# Allegro board ESP331.brd
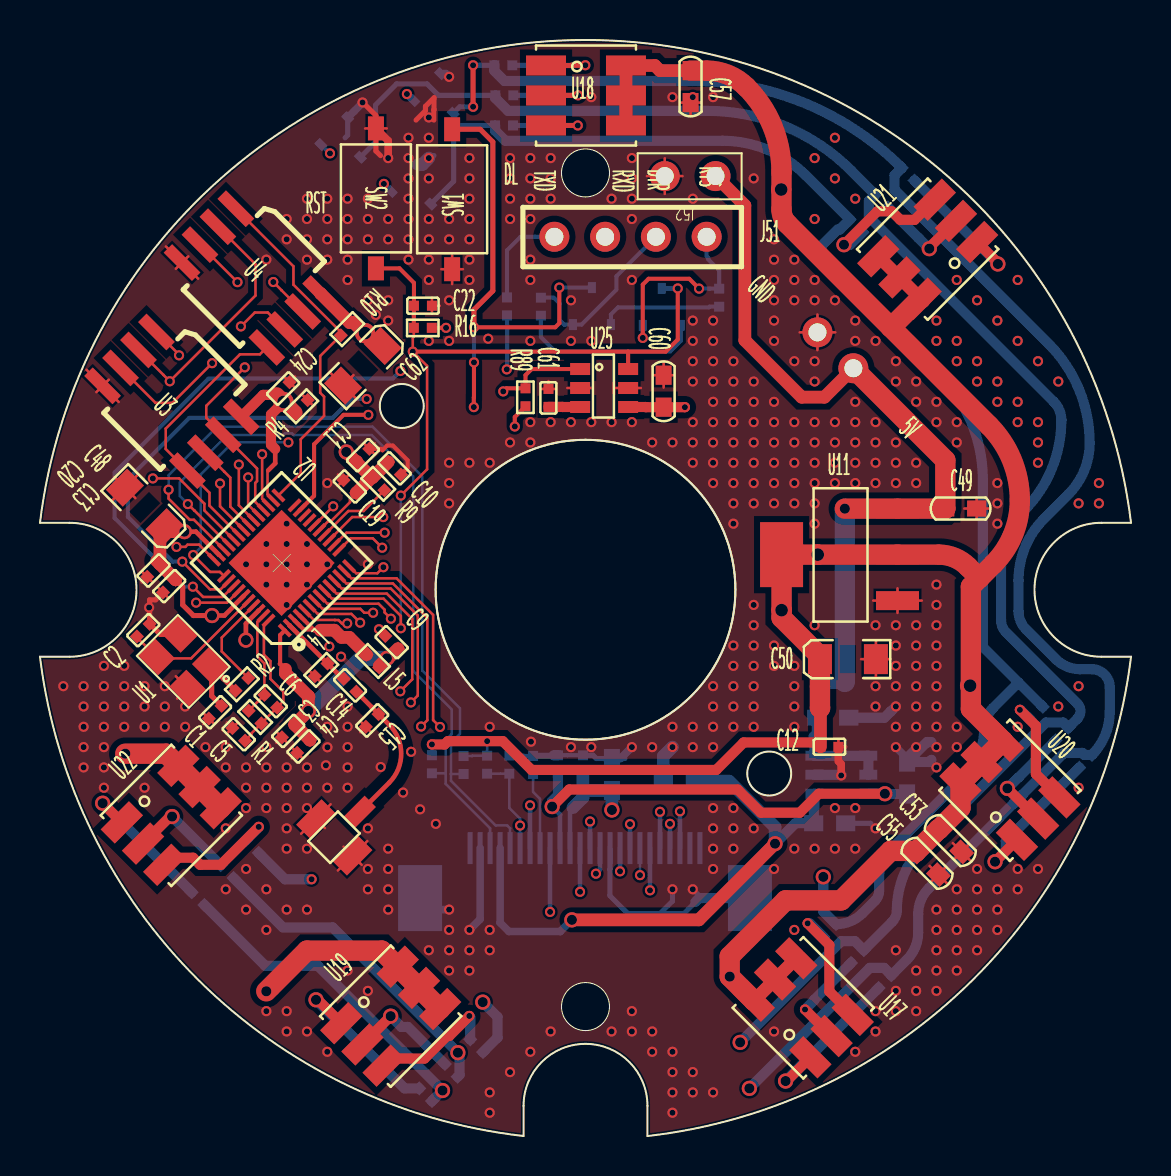
[diagram p0: board, top side]
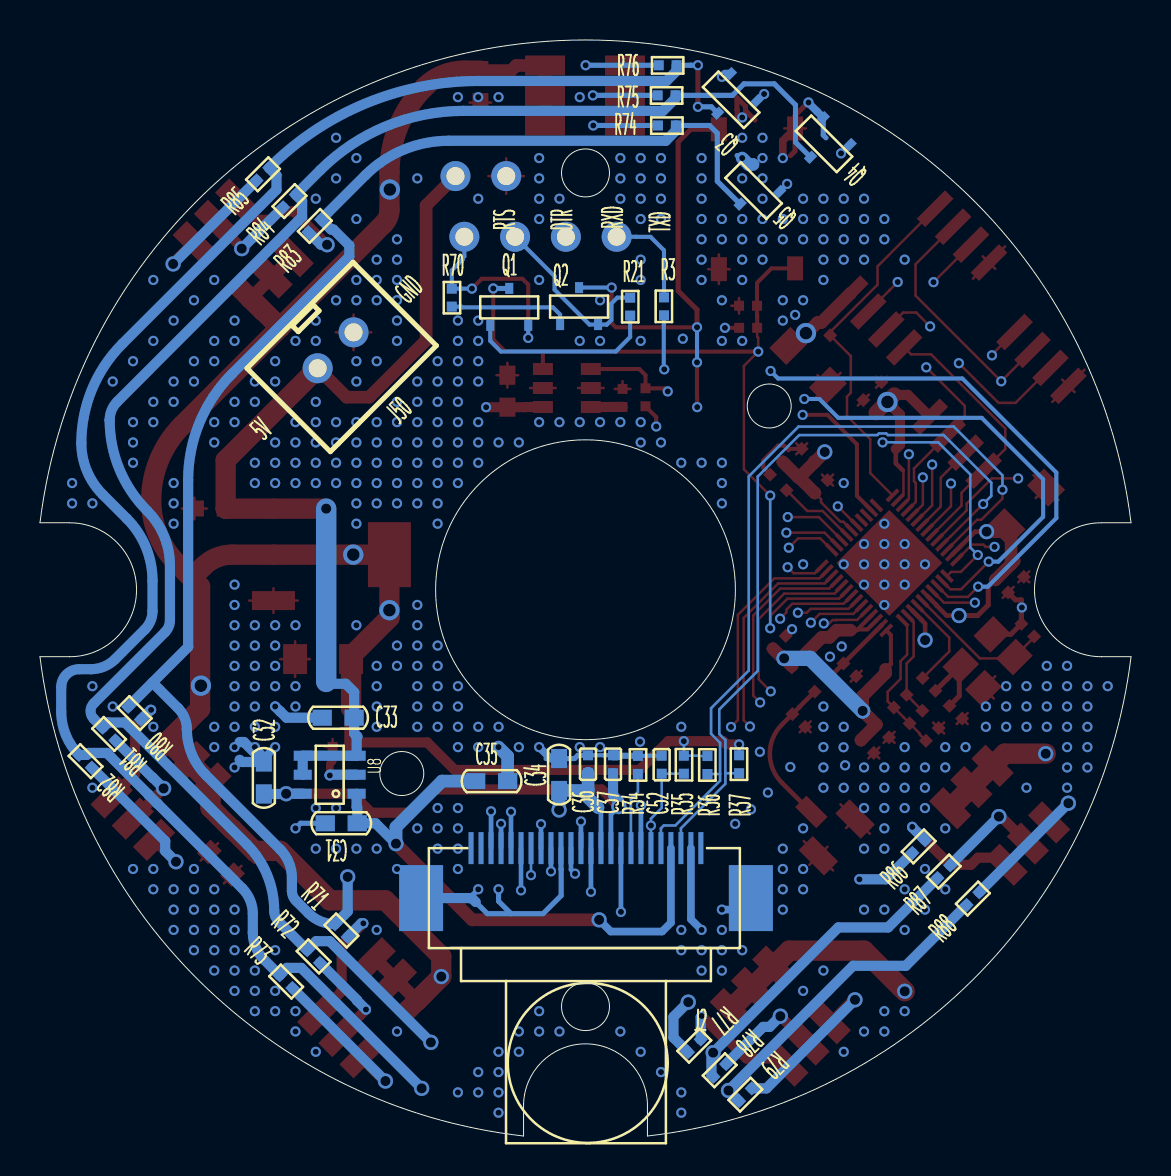
[diagram p1: board, bottom side, seen from below]

Outline 54.59 x 54.82 mm; copper layers: TOP, GND, SIG, BOTTOM. Coordinates in mm from the lower left corner of the outline.
Outline path: circle c18.1,36.52 r1.1 ; circle c27.3,48.17 r1.2 ; circle c27.3,27.32 r7.5 ; circle c27.3,6.47 r1.2 ; circle c36.49,18.13 r1.1 ; 0,30.67 arc(27.3,54.82) 54.59,30.67 53.11,30.67 arc(49.76,27.32) 53.11,23.97 54.59,23.97 arc(46.65,7.79) 30.4,0 30.4,1.51 arc(27.3,4.61) 24.2,1.51 24.2,0 arc(7.94,7.79) 0,23.97 1.48,23.97 arc(4.83,27.32) 1.48,30.67 0,30.67

## Design rules (mm)
net group DTR: nets DTR N16908429
net group RTS: nets N16908427 RTS
net group LED_B: nets LED_B N16960286 N16960785 N16961158 N16961522 N16961899 N16962291
net group LED_G: nets LED_G N16960306 N16960795 N16961160 N16961524 N16961901 N16962293
net group LED_R: nets LED_R N16960332 N16960797 N16961162 N16961526 N16961903 N16962295
net group RF: nets N16860839 N16860948 N16861170 N16861179 N16861214 N16861260 N16861530 N16861598 N16884685

## Placement (name value [footprint] x y rotation side)
C1  GRM1555C1H150JA01D  [C0402]  9.08 21.52 225 top
C2  GRM1555C1H150JA01D  [C0402]  4.85 24.99 45 top
C3  100pF/6.3V(10%)  [C0402]  12.74 20.58 225 top
C4  0.1uF/6.3V(10%)  [C0402]  13.51 19.8 225 top
C5  10nF/6.3V(10%)  [C0402]  10.26 19.77 135 top
C6  3.3nF/6.3V(10%)  [C0402]  11.23 22.07 315 top
C9  0.1uF/6.3V(10%)  [C0402]  17.92 24.38 135 top
C10  0.1uF/6.3V(10%)  [C0402]  17.42 33.72 315 top
C11  1uF/10V(20%)  [C0402]  15.84 33.74 45 top
C12  10uF/6.3V(20%)  [C0402]  39.05 19.47 0 top
C13  10uF/6.3V(20%)  [C0402]  6.79 27.83 225 top
C14  LQP15MN3N6B02D  [C0402]  15.2 22.87 314.3 top
C15  GRM1555C1H2R0BA01D  [C0402]  16.3 20.47 45 top
C19  0.1uF/6.3V(10%)  [C0402]  15.82 32.17 135 top
C20  1uF/10V(20%)  [C0402]  6 28.61 225 top
C22  1uF/10V(20%)  [C0402]  18.71 41.53 0 top
C24  1uF/10V(20%)  [C0402]  11.85 37.07 45 top
C31  10uF/10V(20%)  [C0603]  40.32 15.65 180 bottom
C32  10uF/10V(20%)  [C0603]  43.39 18.71 270 bottom
C33  10uF/10V(20%)  [C0603]  40.47 20.92 180 bottom
C34  4.7uF/10V(20%)  [C0603]  28.62 17.28 90 bottom
C35  4.7uF/10V(20%)  [C0603]  32.79 17.75 180 bottom
C36  0.1uF/16V(10%)  [C0402]  27.17 18.15 90 bottom
C37  1uF/10V(20%)  [C0402]  25.92 18.15 90 bottom
C48  47uF/6.3V(20%)  [C1206]  6.23 30.45 315 top
C49  10uF/16V  [C0603]  45.27 31.39 0 top
C50  22uF/16V  [C1206]  39.03 23.86 180 top
C52  1uF/10V(20%)  [C0402]  23.48 18.12 90 bottom
C53  0.1uF/16V  [C0603]  44.98 15.34 315 top
C55  0.1uF/16V  [C0603]  43.82 14.21 315 top
C57  0.1uF/16V  [C0603]  32.55 53.29 270 top
C60  0.1uF/16V  [C0603]  31.2 36.46 90 top
C61  220nF/6.3V  [C0402]  25.44 36.47 90 top
C62  47uF/10V(20%)  [C1206]  17.15 39.52 45 top
J2  FFC_24P_0P5  [OV9650FSL_PCB]  21.52 14.4 180 bottom
J39  IPEX  [ECT8180001581]  16 16.21 135 top
J50  CON2  [XH_2_54_2P]  40.7 38.4 135 bottom
J51  CON4  [CON_2_54_4P]  25.74 44.98 0 top
J52  CON2  [CON_2_54_2P]  33.8 48.02 180 top
L4  GRM1555C1H2R0BA01D  [R0402]  14.39 23.64 225 top
L5  2.0nH  [R0402]  16.34 24.08 315 top
Q1  S8050(NPN)  [SOT23-3]  31.11 42.4 180 bottom
Q2  S8050(NPN)  [SOT23-3]  27.62 42.44 180 bottom
Q3  S8050(NPN)  [SOT23-3]  20.68 51.16 45 bottom
Q4  S8050(NPN)  [SOT23-3]  16.03 48.96 45 bottom
Q5  S8050(NPN)  [SOT23-3]  19.55 46.61 45 bottom
R1  20K(5%)  [R0402]  10.44 21.27 315 top
R2  51R(5%)  [R0402]  9.79 22.27 45 top
R3  499R(1%)  [R0402]  23.37 41.05 90 bottom
R4  2K/NC  [R0402]  12.76 36.18 45 top
R9  10K(1%)(NC)  [R0402]  16.6 32.94 315 top
R10  10K(1%)  [R0402]  15.69 40.69 225 top
R16  10K(1%)  [R0402]  19.61 40.43 180 top
R21  12K(1%)  [R0402]  25.06 41.94 270 bottom
R34  10K(1%)  [R0402]  24.67 19.01 270 bottom
R35  10K(1%)  [R0402]  22.37 19.02 270 bottom
R36  3.3K(5%)  [R0402]  21.19 18.11 90 bottom
R37  3.3K(5%)  [R0402]  19.61 18.15 90 bottom
R70  12K(1%)  [R0402]  33.98 42.39 270 bottom
R71  100  [R0402]  39.83 10.6 225 bottom
R72  100  [R0402]  41.22 9.3 225 bottom
R73  100  [R0402]  42.6 8.04 225 bottom
R74  100  [R0402]  22.77 50.55 0 bottom
R75  100  [R0402]  22.79 52.05 0 bottom
R76  100  [R0402]  22.73 53.56 0 bottom
R77  100  [R0402]  22.17 4.2 135 bottom
R78  100  [R0402]  20.9 2.96 135 bottom
R79  100  [R0402]  19.61 1.75 135 bottom
R80  100  [R0402]  50.17 21.47 225 bottom
R81  100  [R0402]  51.46 20.43 225 bottom
R82  100  [R0402]  52.63 19.06 225 bottom
R83  100  [R0402]  40.52 45.85 315 bottom
R84  100  [R0402]  41.79 47.09 315 bottom
R85  100  [R0402]  43.12 48.43 315 bottom
R86  100  [R0402]  10.94 14.16 135 bottom
R87  100  [R0402]  9.68 12.91 135 bottom
R88  100  [R0402]  8.23 11.55 135 bottom
R89  10K(1%)  [R0402]  24.29 36.5 90 top
SW1  SW PUSHBUTTON  [KEY_3X6]  20.62 43.36 90 top
SW2  SW PUSHBUTTON  [KEY_3X6]  16.81 50.4 270 top
U1  40MHz+/-10ppm  [CRY_3225]  7.39 22.41 135 top
U2  ESP32-D0WD  [SLP48_5X5]  12.09 28.67 135 top
U3  EN25QH128A  [RZ7889]  4.45 34.49 315 top
U4  PSRAM64H  [RZ7889]  8.43 40.65 315 top
U8  RT9011-BM-PJ6  [SOT-23-6]  40.1 18.07 90 bottom
U11  TLV1117-33IDCY  [SOT223]  42.91 26.78 90 top
U17  RGB  [RGB_6]  38.19 6.41 315 top
U18  RGB  [RGB_6]  27.32 52.05 180 top
U19  RGB  [RGB_6]  17.55 6 225 top
U20  RGB  [RGB_6]  48.53 17.29 315 top
U21  RGB  [RGB_6]  44.42 44.36 45 top
U22  RGB  [RGB_6]  6.57 16.04 225 top
U25  TPS3813K33DBVT  [SOT23-6]  27.03 38.37 0 top

## Library data of the parts
C1-C6 C9-C15 C19 C20 C22 C24 C31-C37 C48-C50 C52 C53 C55 C57 C60-C62 = CAP NP
J2 = CON24_4
J39 = IPEX_0
J50 J52 = CON2
J51 = CON4
L4 L5 = CHOKE
Q1-Q5 = NPN BCE_2
R1-R4 R9 R10 = RESISTOR
R16 R89 = RESISTOR_0: signal model: DEFAULT_RESISTOR_10000OHM_1_2
R21 R34-R37 R70-R88 = RESISTOR_0: signal model: DEFAULT_RESISTOR_200OHM_1_2
SW1 = SW PUSHBUTTON_0
SW2 = SW PUSHBUTTON
U1 = X1_1
U2 = ESP8080_24
U3 = FLASH_3
U4 = PN18S32
U8 = NCP1117_3
U11 = TLV1117-33IDCY
U17-U22 = LED_RGB
U25 = TPS3813K33DBVT

## Footprints (pads in the part's own frame, mm; a bottom-side part is the same pattern mirrored in y, then rotated)
C0402
  rect 0.5x0.5 smd: 1(0,0) 2(0.9,0)
C0603
  rect 0.96x0.8 smd: 1(0,0) 2(1.6,0)
C1206
  rect 1.2x1.5 smd: 1(0,0) 2(-2.8,0)
CON_2_54_2P
  round 1.5 hole 0.9: 1(0,0) 2(2.54,0)
CON_2_54_4P
  round 1.5 hole 0.9: 1(0,0) 2(2.54,0) 3(5.08,0) 4(7.62,0)
CRY_3225
  rect 1.4x1.2 smd: 1(0,-1.6) 2(2.2,-1.6) 3(2.2,0) 4(0,0)
ECT8180001581
  rect 0.8x1.5 smd: 1(0,0)
  rect 1x1.8 smd: 2(-1.3,1.8) 3(1.3,1.8)
KEY_3X6
  rect 1.2x0.8 smd: 1(0,0) 2(7,0)
OV9650FSL_PCB
  rect 0.25x1.6 smd: 1(0,0) 2(-0.5,0) 3(-1,0) 4(-1.5,0) 5(-2,0) 6(-2.5,0) 7(-3,0) 8(-3.5,0) 9(-4,0) 10(-4.5,0) 11(-5,0) 12(-5.5,0) 13(-6,0) 14(-6.5,0) 15(-7,0) 16(-7.5,0) 17(-8,0) 18(-8.5,0) 19(-9,0) 20(-9.5,0) 21(-10,0) 22(-10.5,0) 23(-11,0) 24(-11.5,0)
  rect 2.2x3.3 smd: 25(-14,-2.5) 26(2.5,-2.5)
R0402
  rect 0.5x0.5 smd: 1(0,0) 2(0.9,0)
RGB_6
  rect 2x1 smd: 1(2,-1.5) 2(2,0) 3(2,1.5) 4(-2,1.5) 5(-2,0) 6(-2,-1.5)
RZ7889
  rect 2x0.6 smd: 1(-3.082,5.025) 2(-3.082,3.755) 3(-3.082,2.485) 4(-3.082,1.215) 5(2.918,1.215) 6(2.918,2.485) 7(2.918,3.755) 8(2.918,5.025)
SLP48_5X5
  rect 0.8x0.2 smd: 1(-2.5,2.275) 2(-2.5,1.925) 3(-2.5,1.575) 4(-2.5,1.225) 5(-2.5,0.875) 6(-2.5,0.525) 7(-2.5,0.175) 8(-2.5,-0.175) 9(-2.5,-0.525) 10(-2.5,-0.875) 11(-2.5,-1.225) 12(-2.5,-1.575) 13(-2.5,-1.925) 14(-2.5,-2.275) 25(2.5,-2.275) 26(2.5,-1.925) 27(2.5,-1.575) 28(2.5,-1.225) 29(2.5,-0.875) 30(2.5,-0.525) 31(2.5,-0.175) 32(2.5,0.175) 33(2.5,0.525) 34(2.5,0.875) 35(2.5,1.225) 36(2.5,1.575) 37(2.5,1.925) 38(2.5,2.275)
  rect 0.2x0.8 smd: 15(-1.575,-2.5) 16(-1.225,-2.5) 17(-0.875,-2.5) 18(-0.525,-2.5) 19(-0.175,-2.5) 20(0.175,-2.5) 21(0.525,-2.5) 22(0.875,-2.5) 23(1.225,-2.5) 24(1.575,-2.5) 39(1.575,2.5) 40(1.225,2.5) 41(0.875,2.5) 42(0.525,2.5) 43(0.175,2.5) 44(-0.175,2.5) 45(-0.525,2.5) 46(-0.875,2.5) 47(-1.225,2.5) 48(-1.575,2.5)
  rect 3.75x3.75 smd: 49(0,0)
SOT23-3
  rect 0.4x0.55 smd: 1(-0.95,-1.85) 2(0.95,-1.85) 3(0,0)
SOT23-6
  rect 1x0.6 smd: 1(0,0) 2(0,-0.95) 3(0,-1.9) 4(2.4,-1.9) 5(2.4,-0.95) 6(2.4,0)
SOT223
  rect 0.95x2.15 smd: 1(0,0) 2(2.3,0) 3(4.6,0)
  rect 3.25x2.15 smd: 4(2.3,5.8)
SOT-23-6
  rect 0.5x0.9 smd: 1(-0.95,-1.35) 2(0,-1.35) 3(0.95,-1.35) 4(0.95,1.35) 5(0,1.35) 6(-0.95,1.35)
XH_2_54_2P
  round 1.5 hole 0.9: 1(0,0) 2(2.54,0)

## Nets
AGND: C1.2 C2.2 C3.2 C4.2 C5.2 C9.2 C10.2 C11.2 C12.2 C13.2 C15.1 C19.2 C20.2 C22.2 C24.2 C31.1 C32.1 C33.1 C34.2 C35.2 C36.2 C37.2 C48.2 C49.2 C50.2 C52.2 C53.2 C55.2 C57.2 C60.2 C61.2 C62.2 J2.2(AGND) J2.15(DGND) J2.25(GND#25) J2.26(GND#26) J39.2(GND1) J39.3(GND2) J50.2 J52.2 L4.2 Q3.2(E) Q4.2(E) Q5.2(E) R4.2 R34.1 SW1.1 SW2.1 U1.2(GND#2) U1.4(GND#4) U2.49(GND) U3.4(GND) U4.4(VSS) U8.2(GND) U11.1(ADJ/GND) U25.2(GND) U25.5(WDR)
AVDD_2V8: C31.2 C35.1 J2.4(AVDD) U8.1(VOUT2)
DVDD_1V3: C32.2 C37.1 J2.10(DVDD) U8.6(VOUT1)
VBUS: C33.2 C49.1 J50.1 J52.1 U8.3(EN2) U8.4(EN1) U8.5(VIN) U11.3(INPUT)
VDD_SDIO: C24.1 C62.1 R4.1 R10.1 U2.26(VDD_SDIO) U3.8(VCC) U4.8(VDD)
B: Q5.1(B) U2.34(GPIO5)
CAM_RESET: C52.1 J2.6(RESET) R35.2 U2.13(32K_XN)
DOVDD_3V3: C3.1 C4.1 C9.1 C10.1 C11.1 C12.1 C13.1 C19.1 C20.1 C34.1 C36.1 C48.1 C50.1 C53.1 C55.1 C57.1 C60.1 J2.11(DOVDD) L5.2 R9.1 R16.1 R35.1 R36.2 R37.2 R89.1 U2.1(VDDA#1) U2.19(VDD3P3_RTC) U2.37(VDD3P3_CPU) U2.43(VDDA#43) U2.46(VDDA#46) U11.2(OUTPUT#2) U11.4(OUTPUT#4) U17.4(BA) U17.5(GA) U17.6(RA) U18.4(BA) U18.5(GA) U18.6(RA) U19.4(BA) U19.5(GA) U19.6(RA) U20.4(BA) U20.5(GA) U20.6(RA) U21.4(BA) U21.5(GA) U21.6(RA) U22.4(BA) U22.5(GA) U22.6(RA) U25.4(VCC)
DTR: J51.3 Q2.2(E) R21.1
DVP_HREF: J2.9(HREF) U2.5(SENSOR_VP)
DVP_PCLK: J2.17(PCLK) U2.12(32K_XP)
DVP_VSYNC: J2.7(VSYNC) U2.15(GPIO26)
DVP_Y2: J2.19(Y2) U2.6(SENSOR_CAPP)
DVP_Y3: J2.21(Y3) U2.17(MTMS)
DVP_Y4: J2.22(Y4) U2.20(MTCK)
DVP_Y5: J2.20(Y5) U2.16(GPIO27)
DVP_Y6: J2.18(Y6) U2.8(SENSOR_VN)
DVP_Y7: J2.16(Y7) U2.11(VDET_2)
DVP_Y8: J2.14(Y8) U2.10(VDET_1)
DVP_Y9: J2.12(Y9) U2.7(SENSOR_CAPN)
EN: C22.1 Q1.3(C) R16.2 SW2.2 U2.9(CHIP_PU) U25.6(R\E\S\E\T\)
FLASH_CLK: U2.31(SD_CLK) U3.6(CLK)
G: Q4.1(B) U2.38(GPIO19)
I2C_SCL: J2.5(SCL) R36.1 U2.36(GPIO23)
I2C_SDA: J2.3(SDA) R37.1 U2.35(GPIO18)
IO0: Q2.3(C) SW1.2 U2.23(GPIO0)
IO4: U2.24(GPIO4)
IO12: R9.2 U2.18(MTDI)
IO16: R10.2 U2.25(GPIO16) U4.1(CS#)
IO17: U2.27(GPIO17) U4.6(SCLK)
IO21: Q3.1(B) U2.42(GPIO21)
IO25: J2.13(XCLK) U2.14(GPIO25)
LED_B: Q5.3(C) R71.1 R74.1 R77.1 R80.1 R83.1 R86.1
LED_G: Q4.3(C) R72.1 R75.1 R78.1 R81.1 R84.1 R87.1
LED_R: Q3.3(C) R73.1 R76.1 R79.1 R82.1 R85.1 R88.1
PWDN: J2.8(PWDN) R34.2
RTS: J51.4 Q1.2(E) R70.1
RXD0: J51.2 U2.40(U0RXD)
SCS/CMD: U2.30(SD_CMD) U3.1(/CS)
SDI/SD1: U2.33(SD_DATA_1) U3.5(DI) U4.5(SI/SIO0)
SDO/SD0: U2.32(SD_DATA_0) U3.2(DO) U4.2(SO/SIO1)
SHD/SD2: U2.28(SD_DATA_2) U3.7(/HOLD) U4.7(SIO3)
SWP/SD3: U2.29(SD_DATA_3) U3.3(/WP) U4.3(SIO2)
TXD0: J51.1 R3.2
WDI: R89.2 U2.39(GPIO22) U25.1(WDI)
N16860839: C5.1 C6.2 R1.2 U2.48(CAP1)
N16860948: L5.1 U2.3(VDD3P3#3) U2.4(VDD3P3#4)
N16861170: C14.2 C15.2 J39.1(RF)
N16861179: C2.1 U1.3(XOUT) U2.44(XTAL_N)
N16861214: C1.1 R2.1 U1.1(XIN)
N16861260: C6.1 R1.1 U2.47(CAP2)
N16861530: R3.1 U2.41(U0TXD)
N16861598: R2.2 U2.45(XTAL_P)
N16884685: C14.1 L4.1 U2.2(LNA_IN)
N16908427: Q2.1(B) R70.2
N16908429: Q1.1(B) R21.2
N16960286: R71.2 U17.3(BK)
N16960306: R72.2 U17.2(GK)
N16960332: R73.2 U17.1(RK)
N16960785: R74.2 U18.3(BK)
N16960795: R75.2 U18.2(GK)
N16960797: R76.2 U18.1(RK)
N16961158: R77.2 U19.3(BK)
N16961160: R78.2 U19.2(GK)
N16961162: R79.2 U19.1(RK)
N16961522: R80.2 U20.3(BK)
N16961524: R81.2 U20.2(GK)
N16961526: R82.2 U20.1(RK)
N16961899: R83.2 U21.3(BK)
N16961901: R84.2 U21.2(GK)
N16961903: R85.2 U21.1(RK)
N16962291: R86.2 U22.3(BK)
N16962293: R87.2 U22.2(GK)
N16962295: R88.2 U22.1(RK)
N16988764: C61.1 U25.3(WDT)

Pads without a net: J2 1 23 24; U2 21 22

## Via types
v1: diameter 0.508, hole 0.305, TOP to BOTTOM, 548 vias
v2: diameter 0.762, hole 0.508, TOP to BOTTOM, 31 vias
v3: diameter 1.016, hole 0.635, TOP to BOTTOM, 6 vias

## Routing (per net, layer and track width the routed paths; a pad name or vN(x,y) marks a point on that pad's centre or on a via; arc(x,y) is an arc through that point)
AGND: length 136.9
  TOP w0.127: 6.87,21.88 U1.4 6.8,23 ; 41.69,26.78 U11.1 ; U11.1 44.12,26.78 ; U11.1 42.91,26.17 ; U11.1 42.91,27.4 ; 13.48,23.28 L4.2 14.03,22.72 ; 15.19,14.47 J39.2 ; J39.2 16.09,13.57 ; J39.2 14.91,13.28 ; J39.2 16.38,14.75 ; C50.2 42.57,23.86 ; C50.2 41.09,23.86 ; C50.2 41.83,24.75 ; C50.2 41.83,22.97 ; 16.03,20.74 C15.1 ; C15.1 16.58,20.19 ; C15.1 16.03,20.19 ; 6.3,44.5 U4.4 ; U4.4 6.8,43.38 ; U4.4 7.42,44 ; U4.4 7.91,42.88 ; C1.2 8.72,20.61 ; C1.2 8.17,20.61 ; C1.2 8.17,21.16 ; C55.2 45.39,12.64 ; C55.2 45.33,13.46 ; C55.2 44.57,12.69 ; C55.2 44.51,13.51 ; 11.83,19.67 C3.2 ; C3.2 11.83,20.22 ; C3.2 12.38,19.67 ; 30.07,37.42 U25.5 28.79,37.42 ; 2.33,38.33 U3.4 ; U3.4 3.94,36.72 ; U3.4 3.44,37.84 ; U3.4 2.82,37.21 ; 32.01,51.69 C57.2 ; C57.2 33.09,51.69 ; C57.2 32.55,51.07 ; C49.2 47.49,31.39 ; C49.2 46.87,30.85 ; C49.2 46.87,31.93 ; C49.2 46.25,31.39 ; C22.2 20,41.53 ; C22.2 19.61,41.92 ; C22.2 19.61,41.14 ; 9.35,20.68 C5.2 ; C5.2 9.35,20.13 ; C5.2 9.9,20.68 ; 14.91,33.08 C19.2 ; C19.2 14.91,32.53 ; C19.2 15.46,33.08 ; C61.2 25.83,37.37 ; C61.2 25.05,37.37 ; C61.2 25.44,37.76 ; J52.2 32.15,48.02 ; J52.2 31.26,47.13 ; J52.2 31.26,48.91 ; J52.2 30.37,48.02 ; C60.2 31.2,38.68 ; C60.2 31.74,38.06 ; C60.2 31.2,37.44 ; C60.2 30.66,38.06 ; J39.3 14.26,15.4 ; J39.3 14.54,16.59 ; J39.3 13.35,16.31 ; J39.3 13.07,15.12 ; 45.73,13.83 C53.2 ; C53.2 46.5,14.59 ; C53.2 45.68,14.65 ; C53.2 46.55,13.77 ; 27.67,37.42 U25.2 26.39,37.42 ; 39.95,19.86 C12.2 40.34,19.47 ; 17.35,50.4 SW2.1 16.27,50.4 ; 13.67,36.54 R4.2 13.12,37.09 ; 38.9,39.31 J50.2 ; J50.2 39.79,40.2 ; J50.2 38.9,41.09 ; J50.2 38.01,40.2 ; 20.62,42.62 SW1.1 ; SW1.1 21.16,43.36 ; SW1.1 20.62,44.1 ; SW1.1 20.08,43.36 ; C24.2 12.76,37.43 ; C24.2 12.76,37.98 ; C24.2 12.21,37.98 ; 12.59,19.44 C4.2 ; C4.2 13.15,18.89 ; C4.2 12.59,18.89 ; 6.43,26.91 5.88,27.47 ; C11.2 16.75,34.1 ; C11.2 16.75,34.65 ; C11.2 16.2,34.65 ; C48.2 4.77,31.91 ; C48.2 3.62,31.8 ; C48.2 4.88,33.06 ; C48.2 3.73,32.96 ; 16.81,51.05 16.81,51.14 ; C62.2 15.69,38.06 ; C62.2 15.79,36.91 ; C62.2 14.54,38.17 ; C20.2 5.64,27.69 ; C20.2 5.09,27.69 ; C20.2 5.09,28.25 ; C2.2 5.46,25.65 v1(5.46,26.44)
  TOP w0.203: C11.2 17.06,34.38 17.14,34.3 17.37,34.54 17.66,34.54 18.4,33.8 18.4,33.42 C10.2 18.12,33.08
  TOP w0.254: U1.2 6.02,25.09 C2.2 5.49,26.31 5.49,26.82 5.78,26.82 6.15,27.19 ; 17.04,49.04 16.81,49.27 SW2.1 16.81,51.05 16.15,51.71 ; 19.71,50.82 19.71,51.33 19.72,51.34 19.72,51.94 19.29,51.51 19.29,51.29 18.82,50.82
  TOP w0.381: SW2.1 17.42,49.79 v1(17.42,48.92) ; C9.2 17.28,25.03 v1(16.96,25.35) ; C12.2 39.95,18.75 40.09,18.61 v1(40.09,18.03)
  GND w0.127: 31.26,47.13 J52.2 ; J52.2 30.37,48.02 ; J52.2 32.15,48.02 ; J52.2 31.26,48.91 ; J50.2 39.79,40.2 ; J50.2 38.9,41.09 ; J50.2 38.01,40.2 ; J50.2 38.9,39.31
  BOTTOM w0.203: C52.2 24.18,19.02 24.19,19.01 R34.1 24.72,18.97 25.84,18.97 C37.2 26.4,19.05 27.17,19.05
  BOTTOM w0.254: 33.1,11.9 v1(32.66,12.34) ; 15.26,49.93 15.4,50.07 Q4.2 ; 19.71,49.04 19.26,48.59 19.13,48.59 ; 31.02,11.12 32.21,11.12 32.79,11.71 ; 31.02,11.12 29.42,11.12 28.51,12.03 28.51,13.34 28.52,13.35 J2.15 ; 31.02,11.12 31.65,11.75 v1(31.65,12.34) ; 29.27,18.88 29.04,18.88 ; v1(36.73,13.36) 35.52,12.15 J2.25 ; C34.2 27.84,18.88 27.67,19.05 27.17,19.05 ; v1(41.81,15.39) 41.55,15.65 C31.1 ; R34.1 24.71,19.05 25.7,19.05 ; 15.72,51.26 15.72,51.28 16.15,51.71
  BOTTOM w0.381: Q4.2 16.14,51.68 v1(16.14,51.7) ; v1(29.62,19.45) 29.04,18.88 C34.2 ; v1(20.47,52.98) 20.31,53.14 Q3.2 ; 40.05,18.07 v1(40.09,18.03) ; v1(21.49,10.31) 22.02,10.84 J2.2 ; v1(20.47,11.33) 19.6,11.33 J2.26 ; C32.1 43.39,18.89 ; 43.39,18.89 43.39,19 v1(43.84,19.45) ; 43.39,18.89 v1(42.82,19.45)
  BOTTOM w0.508: 40.11,18.05 40.09,18.07 U8.2 ; 44.6,19.71 44.39,19.71 C32.1 44.49,18.71 44.6,18.82 ; C33.1 42.25,20.92 42.56,21.23 42.57,21.23 v1(42.82,21.49) ; 25.7,19.05 C37.2 ; J2.25 32.99,11.9 32.79,11.71
  BOTTOM w0.635: Q5.2 19.13,48.59 v1(19.46,48.92) ; v1(31.65,19.45) 31.19,19 C35.2
  vias: v1(1.17,22.5) v1(2.18,22.5) v1(2.18,21.49) v1(2.18,20.47) v1(2.18,19.45) v1(2.18,18.44) v1(3.2,23.52) v1(3.2,22.5) v1(3.2,21.49) v1(3.2,20.47) v1(3.2,19.45) v1(3.2,18.44) v1(3.2,17.42) v1(4.22,23.52) v1(4.22,22.5) v1(4.22,21.49) v1(4.22,20.47) v1(5.23,22.5) v1(5.23,21.49) v1(5.23,20.47) v1(5.23,17.42) v1(6.25,22.5) v1(6.25,21.49) v1(6.25,20.47) v1(7.26,21.49) v1(7.26,20.47) v1(8.28,19.45) v1(9.3,19.45) v1(9.3,18.44) v1(9.3,15.39) v1(9.3,12.34) v1(10.31,28.6) v1(10.31,18.44) v1(10.31,17.42) v1(10.31,16.41) v1(10.31,13.36) v1(10.31,11.33) v1(11.33,43.84) v1(11.33,29.61) v1(11.33,28.6) v1(11.33,27.58) v1(11.33,19.45) v1(11.33,18.44) v1(11.33,17.42) v1(11.33,16.41) v1(11.33,12.34) v1(11.33,10.31) v1(11.33,6.25) v1(12.34,45.87) v1(12.34,44.85) v1(12.34,30.63) v1(12.34,29.61) v1(12.34,28.6) v1(12.34,27.58) v1(12.34,26.57) v1(12.34,18.44) v1(12.34,17.42) v1(12.34,16.41) v1(12.34,15.39) v1(12.34,14.37) v1(12.34,11.33) v1(12.34,6.25) v1(12.34,5.23) v1(13.36,46.89) v1(13.36,45.87) v1(13.36,44.85) v1(13.36,43.84) v1(13.36,29.61) v1(13.36,28.6) v1(13.36,27.58) v1(13.36,18.44) v1(13.36,17.42) v1(13.36,16.41) v1(13.36,14.37) v1(13.36,11.33) v1(13.36,5.23) v1(14.31,18.54) v1(14.38,46.89) v1(14.38,45.87) v1(14.38,44.85) v1(14.38,43.84) v1(14.38,32.66) v1(14.38,28.6) v1(14.38,20.47) v1(14.38,19.45) v1(14.38,17.42) v1(14.38,4.21) v1(14.48,24.49) v1(15.06,23.98) v1(15.39,46.89) v1(15.39,45.87) v1(15.39,44.85) v1(15.39,43.84) v1(15.39,42.82) v1(15.39,21.49) v1(15.39,20.47) v1(15.39,19.45) v1(15.39,18.44) v1(15.39,17.42) v1(15.39,8.28) v1(16.41,46.89) v1(16.41,45.87) v1(16.41,44.85) v1(16.41,41.81) v1(16.41,28.6) v1(16.41,15.39) v1(16.41,13.36) v1(16.41,12.34) v1(16.41,7.26) v1(16.81,41.07) v1(17.05,18.46) v1(17.42,45.87) v1(17.42,44.85) v1(17.42,41.81) v1(17.42,40.79) v1(17.42,14.37) v1(17.42,13.36) v1(17.42,12.34) v1(17.42,11.33) v1(18.17,17.18) v1(18.44,49.93) v1(18.44,48.92) v1(18.44,47.9) v1(18.44,46.89) v1(18.44,45.87) v1(18.44,44.85) v1(18.44,43.84) v1(18.57,19.22) v1(19.02,16.34) v1(19.46,50.95) v1(19.46,49.93) v1(19.46,47.9) v1(19.46,45.87) v1(19.46,44.85) v1(19.46,43.84) v1(19.46,42.82) v1(19.46,39.77) v1(19.46,9.29) v1(19.81,15.61) v1(20.47,45.87) v1(20.47,44.85) v1(20.47,41.81) v1(20.47,39.77) v1(20.47,33.68) v1(20.47,32.66) v1(20.47,31.65) v1(20.47,10.31) v1(20.47,9.29) v1(20.47,8.28) v1(21.49,48.92) v1(21.49,47.9) v1(21.49,46.89) v1(21.49,45.87) v1(21.49,44.85) v1(21.49,43.84) v1(21.49,42.82) v1(21.49,33.68) v1(21.49,9.29) v1(21.49,8.28) v1(22.43,39.88) v1(22.5,33.68) v1(22.5,20.47) v1(22.5,10.31) v1(22.5,9.29) v1(22.5,2.18) v1(22.5,1.17) v1(23.52,48.92) v1(23.52,47.9) v1(23.52,46.89) v1(23.52,45.87) v1(23.52,34.69) v1(23.52,3.2) v1(24.54,48.92) v1(24.54,47.9) v1(24.54,46.89) v1(24.54,45.87) v1(24.54,43.84) v1(24.54,42.82) v1(24.54,39.77) v1(24.54,35.71) v1(24.54,34.69) v1(24.54,4.21) v1(24.57,19.72) v1(25.55,48.92) v1(25.55,47.9) v1(25.55,46.89) v1(25.55,35.71) v1(25.55,5.23) v1(26.57,41.81) v1(26.57,39.77) v1(26.57,35.71) v1(26.57,19.45) v1(27.58,51.97) v1(27.58,39.77) v1(27.58,35.71) v1(27.58,19.45) v1(28.6,46.89) v1(28.6,35.71) v1(28.6,5.23) v1(29.62,48.92) v1(29.62,47.9) v1(29.62,46.89) v1(29.62,45.87) v1(29.62,42.82) v1(29.62,35.71) v1(29.62,6.25) v1(29.62,5.23) v1(30.63,34.69) v1(30.63,19.45) v1(30.63,5.23) v1(30.63,4.21) v1(31.65,51.97) v1(31.65,34.69) v1(31.65,20.47) v1(31.65,4.21) v1(31.65,3.2) v1(31.65,2.18) v1(31.65,1.17) v1(32.66,51.97) v1(32.66,46.89) v1(32.66,40.79) v1(32.66,39.77) v1(32.66,38.76) v1(32.66,37.74) v1(32.66,35.71) v1(32.66,34.69) v1(32.66,33.68) v1(32.66,20.47) v1(32.66,19.45) v1(32.66,3.2) v1(32.66,2.18) v1(33.68,51.97) v1(33.68,40.79) v1(33.68,39.77) v1(33.68,38.76) v1(33.68,37.74) v1(33.68,36.73) v1(33.68,35.71) v1(33.68,34.69) v1(33.68,33.68) v1(33.68,32.66) v1(33.68,22.5) v1(33.68,21.49) v1(33.68,20.47) v1(33.68,19.45) v1(33.68,16.41) v1(33.68,15.39) v1(33.68,14.37) v1(33.68,13.36) v1(33.68,2.18) v1(34.7,38.76) v1(34.7,37.74) v1(34.7,36.73) v1(34.7,35.71) v1(34.7,34.69) v1(34.7,33.68) v1(34.7,32.66) v1(34.7,31.65) v1(34.7,30.63) v1(34.7,24.53) v1(34.7,23.52) v1(34.7,22.5) v1(34.7,21.49) v1(34.7,20.47) v1(34.7,16.41) v1(34.7,15.39) v1(34.7,14.37) v1(35.71,47.9) v1(35.71,37.74) v1(35.71,36.73) v1(35.71,35.71) v1(35.71,34.69) v1(35.71,33.68) v1(35.71,32.66) v1(35.71,31.65) v1(35.71,26.57) v1(35.71,25.55) v1(35.71,24.53) v1(35.71,23.52) v1(35.71,22.5) v1(35.71,21.49) v1(35.71,20.47) v1(35.71,15.39) v1(36.73,44.85) v1(36.73,43.84) v1(36.73,42.82) v1(36.73,41.81) v1(36.73,40.79) v1(36.73,39.77) v1(36.73,36.73) v1(36.73,35.71) v1(36.73,34.69) v1(36.73,33.68) v1(36.73,32.66) v1(36.73,31.65) v1(36.73,24.53) v1(36.73,23.52) v1(36.73,5.23) v1(37.74,43.84) v1(37.74,42.82) v1(37.74,41.81) v1(37.74,38.76) v1(37.74,35.71) v1(37.74,34.69) v1(37.74,33.68) v1(37.74,32.66) v1(37.74,31.65) v1(37.74,23.52) v1(37.74,22.5) v1(37.74,21.49) v1(37.74,20.47) v1(37.74,14.37) v1(37.74,10.31) v1(38.76,48.92) v1(38.76,45.87) v1(38.76,42.82) v1(38.76,41.81) v1(38.76,38.76) v1(38.76,37.74) v1(38.76,35.71) v1(38.76,34.69) v1(38.76,33.68) v1(38.76,32.66) v1(38.76,31.65) v1(38.76,30.63) v1(38.76,25.55) v1(38.76,14.37) v1(39.78,49.93) v1(39.78,47.9) v1(39.78,41.81) v1(39.78,35.71) v1(39.78,34.69) v1(39.78,33.68) v1(39.78,32.66) v1(39.78,16.41) v1(39.78,14.37) v1(40.79,46.89) v1(40.79,40.79) v1(40.79,39.77) v1(40.79,36.73) v1(40.79,35.71) v1(40.79,34.69) v1(40.79,33.68) v1(40.79,32.66) v1(40.79,16.41) v1(40.79,14.37) v1(40.79,4.21) v1(41.81,39.77) v1(41.81,35.71) v1(41.81,34.69) v1(41.81,33.68) v1(41.81,32.66) v1(41.81,25.55) v1(41.81,22.5) v1(41.81,21.49) v1(41.81,6.25) v1(41.81,5.23) v1(42.82,38.76) v1(42.82,37.74) v1(42.82,34.69) v1(42.82,33.68) v1(42.82,32.66) v1(42.82,25.55) v1(42.82,24.53) v1(42.82,23.52) v1(42.82,22.5) v1(42.82,20.47) v1(42.82,9.29) v1(42.82,7.26) v1(42.82,6.25) v1(43.84,37.74) v1(43.84,36.73) v1(43.84,33.68) v1(43.84,32.66) v1(43.84,25.55) v1(43.84,24.53) v1(43.84,23.52) v1(43.84,22.5) v1(43.84,21.49) v1(43.84,20.47) v1(43.84,8.28) v1(43.84,7.26) v1(43.84,6.25) v1(44.86,40.79) v1(44.86,39.77) v1(44.86,36.73) v1(44.86,35.71) v1(44.86,27.58) v1(44.86,26.57) v1(44.86,25.55) v1(44.86,24.53) v1(44.86,23.52) v1(44.86,22.5) v1(44.86,21.49) v1(44.86,20.47) v1(44.86,19.45) v1(44.86,18.44) v1(44.86,11.33) v1(44.86,10.31) v1(44.86,9.29) v1(44.86,8.28) v1(44.86,7.26) v1(45.87,42.82) v1(45.87,39.77) v1(45.87,38.76) v1(45.87,35.71) v1(45.87,34.69) v1(45.87,20.47) v1(45.87,19.45) v1(45.87,12.34) v1(45.87,11.33) v1(45.87,10.31) v1(45.87,9.29) v1(45.87,8.28) v1(46.89,41.81) v1(46.89,38.76) v1(46.89,37.74) v1(46.89,13.36) v1(46.89,12.34) v1(46.89,11.33) v1(46.89,10.31) v1(46.89,9.29) v1(47.9,40.79) v1(47.9,37.74) v1(47.9,36.73) v1(47.9,32.66) v1(47.9,31.65) v1(47.9,30.63) v1(47.9,12.34) v1(47.9,11.33) v1(47.9,10.31) v1(48.92,42.82) v1(48.92,39.77) v1(48.92,36.73) v1(48.92,35.71) v1(48.92,20.47) v1(48.92,13.36) v1(48.92,12.34) v1(49.94,38.76) v1(49.94,35.71) v1(49.94,34.69) v1(49.94,33.68) v1(49.94,13.36) v1(50.95,37.74) v1(50.95,21.49) v1(51.97,31.65) v1(51.97,22.5) v1(51.97,17.42) v1(52.98,32.66) v1(52.98,31.65)
AVDD_2V8: length 29.1
  TOP w0.635: v2(36.78,14.62) 32.97,10.81 v2(26.61,10.81)
  BOTTOM w0.381: J2.4 23.02,10.67 23.46,10.23 26.03,10.23 v2(26.61,10.81)
  BOTTOM w0.508: v2(36.78,14.62) 37.8,15.65 C31.2 38.72,16.43 38.75,16.46 U8.1
  BOTTOM w0.635: v2(36.78,14.62) 36.78,15.45 34.48,17.75 C35.1
DVDD_1V3: length 23.9
  TOP w0.508: v2(25.63,16.48) 26.48,17.33 34.91,17.33 36.07,16.17 38.02,16.17 38.97,17.12 v2(42.27,17.12)
  BOTTOM w0.229: J2.10 26.02,16.08 25.71,16.39
  BOTTOM w0.508: C32.2 42.29,17.11 v2(42.27,17.12) U8.6 ; 25.71,16.39 v2(25.63,16.48) 25.63,16.75 25.92,17.04 C37.1
VBUS: length 47.2
  TOP w0.635: J52.1 35.27,46.55 35.27,39.8 38.11,36.96 39.25,36.96 J50.1
  TOP w1.016: J50.1 45.3,33.8 45.3,31.39 45.29,31.38 45.26,31.38 ; 45.26,31.38 C49.1 ; 45.26,31.38 U11.3 v2(40.27,31.38)
  BOTTOM w0.508: 40.27,22.71 40.18,22.62 39.29,22.62 38.87,22.2 C33.2 38.87,20.14 38.71,19.98 38.75,19.95 U8.3 U8.4 U8.5
  BOTTOM w1.016: v2(40.27,31.38) 40.27,22.71
VDD_SDIO: length 19.3
  TOP w0.127: U2.26 11.39,32.09 11.39,33.26 11.42,33.3
  TOP w0.229: 11.77,34.37 11.77,33.65 11.42,33.3
  TOP w0.508: v3(12.19,36.72) 11.56,36.09 11.56,34.58 11.77,34.37 ; C24.1 11.16,37.07 U3.8
  TOP w0.635: v3(12.19,36.72) 11.85,37.06 C24.1 ; C62.1 16.91,39.52 v3(16.27,40.16) 16.22,40.16 R10.1 15.5,40.69 U4.8 ; R4.1 12.74,36.18
  TOP w0.762: R4.1 12.21,36.72 v3(12.19,36.72) 12.19,36.73 C24.1
  SIG w0.635: v3(16.27,40.16) 14.83,38.72 14.19,38.72 v3(12.19,36.72)
B: length 29.1
  TOP w0.127: v1(5.65,32.89) 6.96,32.89 8.23,31.63 8.23,31.29 U2.34
  SIG w0.203: v1(5.65,32.89) 5.15,33.4 5.15,40.16 13.1,48.12 16.72,48.12 v1(17.21,47.63)
  BOTTOM w0.203: v1(17.21,47.63) 17.21,47.62 Q5.1
CAM_RESET: length 23.6
  TOP w0.127: U2.13 15.22,28.26 15.58,27.89 17.84,27.89 19.67,26.07 19.67,20.81 v1(20.02,20.46)
  SIG w0.127: v1(24.02,15.53) 22.54,15.53 20.13,17.95 20.13,19.91 20.02,20.02 v1(20.02,20.46)
  BOTTOM w0.127: R35.2 23.04,18.12 C52.1 23.48,16.41 24.02,15.87 v1(24.02,15.53) J2.6
DOVDD_3V3: length 237.9
  TOP w0.127: U2.19 14.4,30.73 14.53,30.73 15.51,31.71 15.51,31.86 C19.1
  TOP w0.203: U2.1 12.25,25.29 12.02,25.06 12.02,23.63 12.01,23.62 ; R16.1 v1(20.32,40.43) ; R89.1 23.76,35.96 v1(23.76,35.49)
  TOP w0.229: U2.43 9.74,26.57 9.74,26.55 9.23,26.03 v2(8.61,26.03) ; v2(7.22,30.23) 7.8,30.23 8.96,29.07 U2.37 ; U2.46 10.49,25.83 10.49,25.81 10.3,25.63 v2(10.3,24.81) ; 12.01,23.62 12.28,23.34
  TOP w0.254: v2(8.61,26.03) 7.67,26.03 7.14,26.57 7.14,27.47 C13.1 ; L5.2 16.98,23.51
  TOP w0.508: U22.6 U22.5 ; v1(19.61,19.59) 20.25,19.59 20.41,19.75 v1(22.37,19.75) 23.16,19.75 24.6,18.31 33.84,18.31 35.21,19.69 38.83,19.69 39.04,19.48 ; v1(32.27,36.46) C60.1 30.32,36.46 30.31,36.47 U25.4 ; U21.6 U21.5 U21.4 ; 17.36,23.95 v2(17.36,23.89)
  TOP w0.635: U17.6 U17.5 ; U17.6 v2(34.51,7.97) ; U17.6 U17.5 ; U17.5 U17.4 ; C20.1 6,30.22 C48.1 6.45,30.23 v2(7.22,30.23) ; C20.1 5.84,28.77 ; C20.1 6.78,27.83 C13.1 ; v2(15.32,34.22) 15.8,33.74 C11.1 15.84,33.69 R9.1 ; U21.4 U21.5 U21.6 ; C12.1 39.05,22.46 39.03,22.48 ; 6.32,19.12 U22.6 ; U18.5 U18.4 U18.5 ; U18.5 U18.6 30.76,53.55 31.02,53.29 C57.1 ; C4.1 13.51,19.81 C3.1 v2(13.43,21.26) 13.43,22 ; R9.1 15.83,32.17 C19.1 ; R9.1 16.64,32.94 C10.1 ; 13.43,22 12.28,23.15 12.28,23.34 ; 13.43,22 13.46,21.97 ; C9.1 17.43,23.89 v2(17.36,23.89) 16.98,23.51 ; U22.4 U22.5
  TOP w1.016: U20.5 U20.4 ; U20.5 47.12,18.71 ; U20.5 47.12,18.71 ; U20.4 47.12,18.71 ; U20.4 46.58,21.36 46.58,27.48 47,27.91 ; U22.4 U22.5 U22.6 6.32,19.12 v2(4.27,19.12) ; 42.58,40.44 44.03,41.89 U21.6 ; 42.58,40.44 37.4,45.63 arc(37.18,45.95) 37.1,46.34 37.1,48.22 arc(36.64,50.52) 35.34,52.47 arc(34.43,53.08) 33.36,53.29 C57.1 ; 42.58,40.44 47.47,35.55 arc(48.62,33.83) 49.03,31.8 arc(48.68,30.07) 47.71,28.61 47,27.91 ; 47.12,18.71 U20.6 ; 47.12,18.71 U20.6 ; U20.6 46.05,16.42 C53.1 44.96,15.34 C55.1 43.76,14.26 42.56,14.26 40.09,11.79 37.31,11.79 34.51,8.99 v2(34.51,7.97) U17.6 35.72,6.77 ; U19.4 U19.5 U19.6 17.1,9.27 13.36,9.27 v2(11.32,7.24) ; 39.04,21.41 39.03,21.42 C50.1 39.03,24.01 37.11,25.92 v3(37.11,26.3) U11.4 v3(38.92,29.08) U11.2 44.98,29.08 arc(45.76,28.93) 46.43,28.48 47,27.91
  SIG w0.635: 11.28,25.75 10.34,24.81 v2(10.3,24.81) ; 9.82,27.21 9.23,26.62 9.19,26.62 v2(8.61,26.03)
  SIG w0.762: 8.65,30.23 9.8,30.23 13.8,34.23 13.81,34.22 v2(15.32,34.22) ; 8.65,30.23 8.65,28.38 13.43,23.6 v2(13.43,21.26) ; 8.65,30.23 v2(7.22,30.23)
  SIG w1.016: v2(11.32,7.24) 5.31,13.25 5.31,14.2 4.27,15.25 v2(4.27,19.12)
  BOTTOM w0.127: R36.2 21.63,19.01 21.65,19.02 R35.1 v1(22.37,19.75) ; R37.2 v1(19.61,19.59)
  BOTTOM w0.229: 26.67,16.43 26.52,16.28 J2.11
  BOTTOM w0.635: 27.17,17.31 C36.1 ; 27.17,17.31 27.17,16.93 26.67,16.43 ; 27.17,17.31 27.19,17.28 C34.1 v2(28.62,16.31)
  BOTTOM w0.762: v2(17.36,23.89) 16.06,23.89 v2(13.43,21.26)
  vias: v3(37.08,47.35) v3(46.54,22.53)
DTR: length 9
  BOTTOM w0.203: R21.1 25.7,41.94 26,41.64 26,40.82 26.23,40.59 26.24,40.59 26.24,40.59 Q2.2 27.1,40.59 28.84,42.33 28.84,43 J51.3
DVP_HREF: length 26.1
  TOP w0.127: U2.5 13.24,26.28 13.7,25.82 14.75,25.82 14.76,25.81 14.94,25.81 15.1,25.64 v1(15.37,25.64)
  SIG w0.127: v1(15.37,25.64) 15.96,25.05 15.96,17.58 22.34,11.21 v1(25.52,11.21)
  BOTTOM w0.229: J2.9 v1(25.52,11.21)
DVP_PCLK: length 27.4
  TOP w0.127: v1(19.07,20.48) 19.38,20.8 19.38,25.91 17.66,27.64 15.33,27.64 14.97,28 U2.12
  SIG w0.127: v1(29.52,15.6) 29.52,14.52 29.23,14.23 23.36,14.23 19.07,18.52 v1(19.07,20.48)
  BOTTOM w0.229: J2.17 v1(29.52,15.6)
DVP_VSYNC: length 21.7
  TOP w0.127: v1(17.12,29.43) 16.66,29.9 15.55,29.9 U2.15
  SIG w0.127: v1(17.12,29.43) 17.63,28.92 17.63,27.59 18.8,26.42 18.8,23.12 20.96,20.95 20.96,18.29 22.71,16.54 v1(24.52,16.54)
  BOTTOM w0.229: J2.7 v1(24.52,16.54)
DVP_Y2: length 30.3
  TOP w0.127: v1(16.02,25.68) 15.58,26.12 13.9,26.12 U2.6
  SIG w0.127: v1(30.52,12.29) 30.52,11.85 30.34,11.67 22.41,11.67 16.26,17.81 16.26,25.44 v1(16.02,25.68)
  BOTTOM w0.229: J2.19 v1(30.52,12.29)
DVP_Y3: length 30.4
  TOP w0.127: v1(17.18,30.96) 15.62,30.96 U2.17
  SIG w0.127: v1(31.52,15.62) 31.52,16.68 30.8,17.4 22.81,17.4 21.56,18.64 21.56,21.29 19.39,23.46 19.39,26.82 18.35,27.86 18.35,29.78 v1(17.18,30.96)
  BOTTOM w0.229: J2.21 v1(31.52,15.62)
DVP_Y4: length 32.1
  TOP w0.127: U2.20 v1(14.67,31.5)
  SIG w0.127: v1(14.67,31.5) 17.48,31.5 18.75,30.22 18.75,28.03 19.65,27.14 19.65,23.69 21.85,21.49 21.85,18.97 23.05,17.77 31.36,17.77 32.02,17.11 v1(32.02,16.24)
  BOTTOM w0.229: J2.22 v1(32.02,16.24)
DVP_Y5: length 28.7
  TOP w0.127: U2.16 15.33,30.18 v1(17.25,30.18)
  SIG w0.127: v1(31.02,16.22) 30.13,17.11 22.63,17.11 21.24,18.5 21.24,21.14 19.09,23.28 19.09,26.54 17.98,27.65 17.98,29.44 v1(17.25,30.18)
  BOTTOM w0.229: J2.20 v1(31.02,16.22)
DVP_Y6: length 28.6
  TOP w0.127: U2.8 13.99,27.02 14.38,26.62 16.95,26.62 17.24,26.33 17.24,26.19 v1(17.56,25.88)
  SIG w0.127: v1(30.02,13.05) 29.64,12.67 23.46,12.67 17.42,18.71 17.42,22.32 18.25,23.15 18.25,24.57 17.56,25.26 v1(17.56,25.88)
  BOTTOM w0.127: J2.18 v1(30.02,13.05)
DVP_Y7: length 26.9
  TOP w0.127: U2.11 14.72,27.76 15.1,27.39 17.55,27.39 18.9,26.03 18.9,22.03 v1(18.56,21.69)
  SIG w0.127: v1(18.56,21.69) 18.07,21.2 18.07,19.02 23.38,13.7 28.76,13.7 29.02,13.44 v1(29.02,13.24)
  BOTTOM w0.229: J2.16 v1(29.02,13.24)
DVP_Y8: length 26.1
  TOP w0.127: v1(18.03,22.24) 18.63,22.84 18.63,25.86 17.35,27.13 14.84,27.13 14.48,27.5 U2.10
  SIG w0.127: v1(27.82,13.12) 27.37,13.12 27.37,13.12 23.48,13.12 17.71,18.89 17.71,21.93 v1(18.03,22.24)
  BOTTOM w0.229: J2.14 28.02,13.32 v1(27.82,13.12)
DVP_Y9: length 28
  TOP w0.127: v1(16.67,26.17) 16.22,26.17 16.03,26.37 14.14,26.37 U2.7
  SIG w0.127: v1(27.02,12.22) 22.42,12.22 16.6,18.03 16.6,21.87 17.96,23.23 17.96,24.47 17.61,24.82 16.87,24.82 16.52,25.17 16.52,25.53 16.67,25.69 v1(16.67,26.17)
  BOTTOM w0.229: J2.12 v1(27.02,12.22)
EN: length 43.1
  TOP w0.127: R16.2 18.71,39.99 18.65,39.93 v1(18.65,39.24) 19.37,38.52 19.37,33.35 v1(18.05,32.04) ; v1(18.05,25.4) 18.05,26.02 17.19,26.88 14.61,26.88 14.23,27.26 U2.9
  TOP w0.203: SW2.2 17.99,43.4 18.71,42.68 C22.1 18.71,41.05 18.71,41.05 R16.2 ; 29.42,39.24 31.31,39.24 31.91,39.84 v1(31.91,42.4) ; 29.42,39.24 v1(18.65,39.24) ; 29.42,39.24 29.43,39.23 U25.6
  BOTTOM w0.127: v1(18.05,25.4) v1(18.05,32.04)
  BOTTOM w0.254: v1(31.91,42.4) 31.11,42.4 Q1.3
FLASH_CLK: length 4.5
  TOP w0.127: U2.31 9.52,31.48 9.52,32.93 9.22,33.23 9.22,33.23 U3.6
G: length 29.9
  TOP w0.127: v1(6.83,29.47) 7.27,29.47 7.38,29.58 7.96,29.58 U2.38
  SIG w0.203: v1(14.51,49.15) 14.17,49.49 13.36,49.49 4.21,40.35 4.21,30.66 5.4,29.47 v1(6.83,29.47)
  BOTTOM w0.203: v1(14.51,49.15) 14.49,49.15 Q4.1
I2C_SCL: length 41.5
  TOP w0.127: U2.36 7.7,30.82 7.49,30.82 6.43,31.88 v1(6.43,32.33)
  BOTTOM w0.127: v1(6.43,32.33) 6.43,33.05 8.87,35.49 16.64,35.49 19.13,32.99 19.13,23.28 21.01,21.4 21.01,20.12 20.56,19.67 20.56,18.1 ; J2.5 23.52,15.39 23.38,15.53 22.8,15.53 20.56,17.77 20.56,18.1 ; 20.56,18.1 20.57,18.11 R36.1
I2C_SDA: length 38.9
  TOP w0.127: v1(7.4,31.61) 7.71,31.3 7.72,31.3 9.03,29.99 9.04,29.99 U2.35
  BOTTOM w0.127: 20.3,18.17 20.3,19.8 20.6,20.11 20.6,21.34 18.68,23.26 18.68,32.98 16.6,35.06 12.69,35.06 12.61,35.14 12.25,35.14 12.17,35.06 9.37,35.06 6.99,32.68 6.99,32.02 v1(7.4,31.61) ; 20.3,18.17 20.3,17.62 22.52,15.39 J2.3 ; 20.3,18.17 20.28,18.15 R37.1
IO0: length 36.8
  TOP w0.203: v1(21.72,38.7) 21.72,36.95 21.71,36.94 v1(21.71,36.46) ; U2.23 13.71,32.02 13.71,34.6 15.19,36.07 v1(16.43,36.07) ; v1(25.99,42.44) 25.99,40.66 25.78,40.45 v1(21.72,40.45)
  TOP w0.254: v1(21.72,40.45) 21.72,41.33 22.66,42.28 22.66,49.72 22.02,50.36 SW1.2
  SIG w0.203: v1(16.43,36.07) 17.27,35.23 19.67,35.23 20.91,36.46 v1(21.71,36.46)
  BOTTOM w0.203: v1(21.72,40.45) v1(21.72,38.7) ; Q2.3 v1(25.99,42.44)
IO12: length 3.9
  TOP w0.127: R9.2 16.19,31.26 15.43,31.26 U2.18
IO16: length 18
  TOP w0.127: U2.25 13.05,33.16 13.05,34.85 14.21,36.02 14.21,36.98 14.02,37.18 14.02,39.02 R10.2 15.05,40.21 12.68,42.58 12.68,43.5 U4.1
IO17: length 12.4
  TOP w0.127: U4.6 11.4,41.19 10.75,41.19 v1(10.05,40.5) ; v1(11.12,34.1) 11.12,31.87 11.44,31.55 U2.27
  SIG w0.127: v1(11.12,34.1) 11.12,39.43 v1(10.05,40.5)
IO21: length 38.4
  TOP w0.127: v1(7.81,26.68) 9.36,26.68 U2.42
  SIG w0.203: v1(18.36,52.12) 16.98,50.74 13.86,50.74 3.45,40.34 3.45,30.56 7.33,26.68 v1(7.81,26.68)
  BOTTOM w0.203: v1(18.36,52.12) 18.38,52.12 Q3.1
IO25: length 23
  TOP w0.127: v1(17.18,28.45) 16.88,28.15 15.82,28.15 15.47,28.5 U2.14
  SIG w0.127: v1(17.18,28.45) 17.18,27.54 18.51,26.21 18.51,23.01 20.62,20.9 20.62,18.13 22.77,15.99 24.74,15.99 25,15.73 v1(27.52,15.73)
  BOTTOM w0.229: J2.13 v1(27.52,15.73)
LED_B: length 110.7
  SIG w0.508: v1(13.59,12.84) 19.73,6.7 v2(22.15,6.7) 25.34,9.89 35.36,9.89 38.43,12.96 v2(39.19,12.96)
  BOTTOM w0.254: Q5.3 20.7,47.76 20.7,50.16 21.09,50.55 R74.1
  BOTTOM w0.508: v1(13.59,12.84) 12.26,12.84 R86.1 ; R77.1 22.89,4.92 22.89,5.96 v2(22.15,6.7) ; v2(39.19,12.96) 39.19,11.23 R71.1 arc(40.55,10.74) 41.15,11.14 41.79,11.78 arc(41.93,12) 41.99,12.26 41.99,12.92 arc(42.14,13.69) 42.57,14.34 46.29,18.06 arc(46.99,19.11) 47.24,20.34 arc(47.35,20.92) 47.68,21.4 48.96,22.68 ; R80.1 48.96,22.68 ; 48.96,22.68 47.18,24.47 47.18,32.82 arc(46.6,35.69) 44.98,38.13 39.11,43.99 39.11,44.55 39.91,45.34 40.02,45.34 R83.1 38.31,48.06 arc(36.4,49.33) 34.14,49.78 23.28,49.78 22.77,50.29 R74.1
LED_G: length 122.3
  SIG w0.508: v2(20.91,4.17) 25.73,8.99 30.73,8.99 v2(35.03,4.69)
  BOTTOM w0.254: Q4.3 16.79,49.71 16.79,51.57 17.85,52.63 19.37,52.63 19.94,52.05 R75.1
  BOTTOM w0.508: R87.1 12.16,10.43 14.65,10.43 v2(20.91,4.17) 20.99,4.08 20.99,3.06 R78.1 ; R75.1 22.79,51.92 23.42,51.28 33.39,51.28 arc(37.28,50.51) 40.58,48.3 R84.1 41.48,46.78 41.48,45.98 50.72,36.73 arc(51.01,36.31) 51.1,35.81 arc(50.62,33.36) 49.23,31.27 arc(48.38,30.01) 48.09,28.53 48.09,25.81 arc(48.15,25.48) 48.34,25.2 51.9,21.63 arc(52.06,21.25) 51.9,20.87 R81.1 51.45,20.43 51.19,20.68 50.34,20.68 44.25,14.6 arc(43.23,13.07) 42.87,11.27 arc(42.81,10.97) 42.64,10.72 R72.1 40.77,9.74 40.09,9.74 v2(35.03,4.69)
LED_R: length 126
  TOP w0.254: v1(21.67,51.48) v1(21.67,53.56)
  SIG w0.508: v2(35.49,2.38) 29.74,8.14 26.01,8.14 v2(20.14,2.28)
  BOTTOM w0.254: R76.1 22.03,53.56 v1(21.67,53.56) ; v1(21.67,51.48) 21,51.48 Q3.3
  BOTTOM w0.508: R88.1 11.27,8.51 13.9,8.51 v2(20.14,2.28) R79.1 ; v2(35.49,2.38) 41.52,8.41 42.24,8.41 42.6,8.05 R73.1 43.38,8.82 arc(43.79,9.44) 43.94,10.18 43.94,11.11 arc(44.08,11.8) 44.47,12.39 48.71,16.63 48.72,16.63 49.17,17.07 49.17,17.09 51.24,19.16 52.15,19.16 52.25,19.06 R82.1 arc(53.29,20.05) 53.53,21.22 53.53,22.45 arc(53.26,23.09) 52.63,23.35 52.04,23.35 arc(51.38,23.48) 50.83,23.85 49.34,25.34 arc(49.06,25.76) 48.96,26.26 48.96,27.78 arc(49.29,29.46) 50.24,30.88 51.45,32.09 arc(52.24,33.27) 52.52,34.67 arc(51.99,37.35) 50.47,39.63 42.76,47.34 42.76,48.05 43.12,48.41 R85.1 arc(38.31,51.65) 32.63,52.78 23.24,52.78 22.73,53.28 R76.1
PWDN: length 3.9
  BOTTOM w0.127: J2.8 25.02,16.86 24.67,17.21 R34.2
RTS: length 10.3
  TOP w0.203: v1(30.16,39.92) 30.16,42.59 30.45,42.88 32.49,42.88 v1(32.98,42.39)
  BOTTOM w0.203: Q1.2 v1(30.16,39.92) ; v1(32.98,42.39) 33.5,42.39 33.5,42.39 R70.1 33.98,43.3 33.44,43.85 33.44,43.92 33.36,44 J51.4
RXD0: length 41.7
  TOP w0.127: v1(7.12,28.73) 8.5,27.35 9.04,27.35 U2.40
  SIG w0.203: v1(16.35,36.87) 16.35,37.35 16.75,37.75 27.68,37.75 28.27,38.35 28.27,44 28.28,44 J51.2
  BOTTOM w0.203: v1(16.35,36.87) 15.59,36.87 14.65,35.92 7.47,35.92 4.4,32.85 4.4,30.97 6.64,28.73 v1(7.12,28.73)
SCS/CMD: length 11.4
  TOP w0.127: v1(6.96,39.05) 6.96,39.09 U3.1 ; U2.30 9.95,31.55 v1(9.95,33.59)
  SIG w0.127: v1(9.95,33.59) 9.95,36.06 v1(6.96,39.05)
SDI/SD1: length 13.6
  TOP w0.127: U4.5 11,39.1 10,39.1 6.29,35.39 6.29,34.37 U3.5 8.48,32.18 8.48,31.53 U2.33
SDO/SD0: length 21.5
  TOP w0.127: U2.32 9.01,31.5 v1(9.01,32.64) ; U4.2 10.78,43.61 10.78,42.04 v1(6.49,37.75) 6.18,38.07 6.18,38.07 U3.2
  SIG w0.127: v1(9.01,32.64) 9.01,35.24 v1(6.49,37.75)
SHD/SD2: length 17.4
  TOP w0.127: v1(10.25,38.45) 8.32,36.52 8.32,35.93 U3.7 10.86,33.39 10.86,32.76 10.77,32.67 10.77,31.72 U2.28 ; v1(11.67,42.72) 12.08,42.31 12.08,42.31 U4.7
  SIG w0.127: v1(11.67,42.72) 11.23,42.72 11.14,42.62 11.14,42.62 9.06,40.54 9.06,39.64 v1(10.25,38.45)
SWP/SD3: length 22.6
  TOP w0.127: v1(10.42,32.94) 10.42,31.58 U2.29 ; U3.3 5.78,36.67 6.63,36.67 v1(8.61,38.66) ; U4.3 v1(9.88,42.71)
  SIG w0.127: v1(10.42,32.94) 10.42,36.86 v1(8.61,38.66) 7.84,39.43 7.84,40.67 v1(9.88,42.71)
TXD0: length 5
  BOTTOM w0.203: J51.1 24.76,44.98 24.76,44.98 24.04,44.98 23.37,44.3 R3.2
WDI: length 28.8
  TOP w0.127: v1(7.67,29.06) 8.51,28.22 9,28.22 U2.39
  TOP w0.203: U25.1 24.6,38.37 24.29,38.06 R89.2 23.33,37.4 v1(23.18,37.25)
  SIG w0.127: v1(12.43,34.7) 12.95,34.7 13.63,35.38 16.21,35.38 16.66,34.93 22.03,34.93 23.18,36.08 v1(23.18,37.25)
  BOTTOM w0.127: v1(7.67,29.06) 8.04,29.44 8.04,33.1 9.64,34.7 v1(12.43,34.7)
N16860839: length 7.3
  TOP w0.127: C5.1 10.57,20.08 10.57,20.13 R1.2 11.39,20.95 11.39,20.96 C6.2 12.18,21.74 12.18,22.22 11.53,22.86 11.53,23.75 11.2,24.08 11.2,25.55 11.43,25.79 U2.48
N16860948: length 5.3
  TOP w0.203: 13.68,25.34 13.19,25.34 U2.3 ; 13.68,25.34 13.72,25.3 ; 13.68,25.34 U2.4
  TOP w0.229: 14.03,25.3 13.72,25.3
  TOP w0.635: L5.1 15.47,24.94 15.08,24.94 14.72,25.3 14.03,25.3
N16861170: length 7.6
  TOP w0.229: C14.2 15.83,22.23 16.59,21.46 16.59,21.45 C15.2 17.47,20.57 arc(18.07,19.12) 17.47,17.68 16.01,16.21 ; J39.1 16.01,16.21 ; 16.01,16.21 16.01,16.21
N16861179: length 7.3
  TOP w0.127: U2.44 7.56,23.89 5.91,23.89 U1.3 4.85,24.95 C2.1
N16861214: length 3.9
  TOP w0.254: C1.1 8.59,22.01 8.59,23.47 ; 8.59,23.47 9.2,22.86 R2.1 ; 8.59,23.47 U1.1
N16861260: length 5.4
  TOP w0.127: U2.47 10.88,25.72 10.88,23.99 11.23,23.64 C6.1 10.92,21.76 10.92,21.75 R1.1
N16861530: length 34.6
  TOP w0.127: U2.41 9.7,27.52 9.14,26.96 8.16,26.96 v1(7.65,27.48)
  SIG w0.203: v1(23.36,38.35) 22.87,38.35 22.72,38.19 18.59,38.19 18.52,38.27 v1(18.03,38.27)
  BOTTOM w0.203: v1(18.03,38.27) 17.66,37.89 8.44,37.89 3.74,33.19 3.74,30.91 7.17,27.48 v1(7.65,27.48) ; R3.1 23.37,40.57 23.38,40.56 23.38,38.41 23.36,38.38 v1(23.36,38.35)
N16861598: length 4.8
  TOP w0.127: U2.45 9.09,24.93 9.09,24.24 R2.2
N16884685: length 3.8
  TOP w0.229: C14.1 15.16,22.87 L4.1 12.5,25.53 U2.2
N16908427: length 6.1
  BOTTOM w0.203: R70.2 33.5,41.49 33.47,41.45 28.92,41.45 28.57,41.09 Q2.1
N16908429: length 9.4
  BOTTOM w0.203: R21.2 25.06,39.96 25.79,39.24 31.53,39.24 32.06,39.77 Q1.1
N16960286: length 6.6
  TOP w0.508: U17.3 40.67,6.06 U17.3 ; U17.3 39.5,7.23 39.5,9.55 v1(38.41,10.64)
  BOTTOM w0.508: v1(38.41,10.64) 38.51,10.64 R71.2
N16960306: length 5.2
  TOP w0.508: U17.2 v1(38.28,6.33)
  BOTTOM w0.508: R72.2 38.73,6.81 38.73,6.78 v1(38.28,6.33)
N16960332: length 8.3
  TOP w0.508: v2(37.31,2.75) 37.36,2.75 U17.1
  BOTTOM w0.508: R73.2 v2(37.31,2.75)
N16960785: length 4.8
  TOP w0.254: v1(26.91,50.55) 25.32,50.55 U18.3
  BOTTOM w0.254: R74.2 v1(26.91,50.55)
N16960795: length 4.8
  TOP w0.254: v1(26.93,52.05) 25.33,52.05 U18.2
  BOTTOM w0.254: R75.2 v1(26.93,52.05)
N16960797: length 5.6
  TOP w0.254: v1(27.29,53.56) 26.59,53.56 26.57,53.55 U18.1
  BOTTOM w0.254: R76.2 v1(27.29,53.56)
N16961158: length 6.5
  TOP w0.508: v1(21.48,6.01) 20.48,5 20.37,5 19.24,3.88 17.55,3.88 17.19,3.52 U19.3
  BOTTOM w0.508: v1(21.48,6.01) 21.48,5.99 21.53,5.94 R77.2
N16961160: length 5.7
  TOP w0.508: U19.2 v2(17.55,6)
  BOTTOM w0.508: R78.2 18.4,5.46 18.09,5.46 v2(17.55,6)
N16961162: length 8.7
  TOP w0.508: v2(13.81,6.81) 13.9,6.81 U19.1
  BOTTOM w0.508: v2(13.81,6.81) 18.24,2.38 R79.2
N16961522: length 5.9
  TOP w0.508: v1(49.03,21.32) 49.83,20.52 49.83,18.11 U20.3
  BOTTOM w0.508: R80.2 49.05,21.32 v1(49.03,21.32)
N16961524: length 5.6
  TOP w0.508: U20.2 49.92,15.88 v2(48.4,17.39)
  BOTTOM w0.508: R81.2 48.96,17.93 48.94,17.93 v2(48.4,17.39)
N16961526: length 8
  TOP w0.508: U20.1 v2(47.79,13.72)
  BOTTOM w0.508: R82.2 48.32,14.75 48.32,14.26 v2(47.79,13.72)
N16961899: length 7
  TOP w0.508: U21.3 43.76,45.83 43.04,45.83 42.62,46.25 41.9,46.25 v2(40.23,44.58)
  BOTTOM w0.508: v2(40.23,44.58) 40.53,44.58 R83.2
N16961901: length 4.9
  TOP w0.508: U21.2 44.5,44.44 v2(44.5,44.39)
  BOTTOM w0.508: R84.2 43.95,44.93 43.96,44.93 v2(44.5,44.39)
N16961903: length 7.4
  TOP w0.508: v2(47.93,43.62) 47.93,43.68 46.89,44.72 U21.1
  BOTTOM w0.508: R85.2 v2(47.93,43.62)
N16962291: length 6.7
  TOP w0.508: U22.3 6.22,13.57 6.57,13.92 7.66,13.92 8.01,13.57 9.05,13.57 v1(10.95,15.46)
  BOTTOM w0.508: v1(10.95,15.46) 10.95,15.44 R86.2
N16962293: length 5.5
  TOP w0.508: v2(6.61,15.98) 6.51,15.98 U22.2
  BOTTOM w0.508: R87.2 v2(6.61,15.98)
N16962295: length 7.7
  TOP w0.508: U22.1 v2(3.14,16.65)
  BOTTOM w0.508: R88.2 v2(3.14,16.65)
N16988764: length 1.6
  TOP w0.508: C61.1 26.14,36.47 26.15,36.47 U25.3

## Copper pours and planes (outline as drawn; the poured copper is in the pictures)
AGND on TOP: 54.44,23.84 46.56,7.88 30.53,0.15 30.53,1.51 27.3,4.74 24.07,1.51 24.07,0.15 8.03,7.88 0.15,23.84 1.48,23.84 4.96,27.32 1.48,30.8 0.15,30.8 27.3,54.69 54.44,30.8 53.11,30.8 49.63,27.32 53.11,23.84 ; 13 cut-outs
AGND on GND: 0.15,30.8 27.3,54.69 54.44,30.8 53.11,30.8 49.63,27.32 53.11,23.84 54.44,23.84 46.56,7.88 30.53,0.15 30.53,1.51 27.3,4.74 24.07,1.51 24.07,0.15 8.03,7.88 0.15,23.84 1.48,23.84 4.96,27.32 1.48,30.8
DOVDD_3V3 on SIG: 54.44,23.84 46.56,7.88 30.53,0.15 30.53,1.51 27.3,4.74 24.07,1.51 24.07,0.15 8.03,7.88 0.15,23.84 1.48,23.84 4.96,27.32 1.48,30.8 0.15,30.8 27.3,54.69 54.44,30.8 53.11,30.8 49.63,27.32 53.11,23.84 ; 3 cut-outs

## Text on the board
Ref Des/Silkscreen Bottom: TXD | RXD | DTR | RTS | GND | 5V
User.Comments: tTXD
Ref Des/Silkscreen Top: RST | DL | TXD | RXD | DTR | RTS | GND | 5V
NCLEGEND-1-4: FIGURE | SIZE | 12.0 | 20.0 | 25.0 | 35.429 | DRILL CHART: TOP to BOTTOM | ALL UNITS ARE IN MILS | PLATED | QTY | 772 | 32 | 6
